# Altium PCB PCB_s01.PcbDoc (part 1 of 2)
Units mm, origin at the board's own origin, x right, y up, seen from the top; angles counter-clockwise.
Board outline 127 x 56.01 mm, 2 copper layers (Top Layer, Bottom Layer); 73 components, 51 nets, 213 pads, 570 vias.
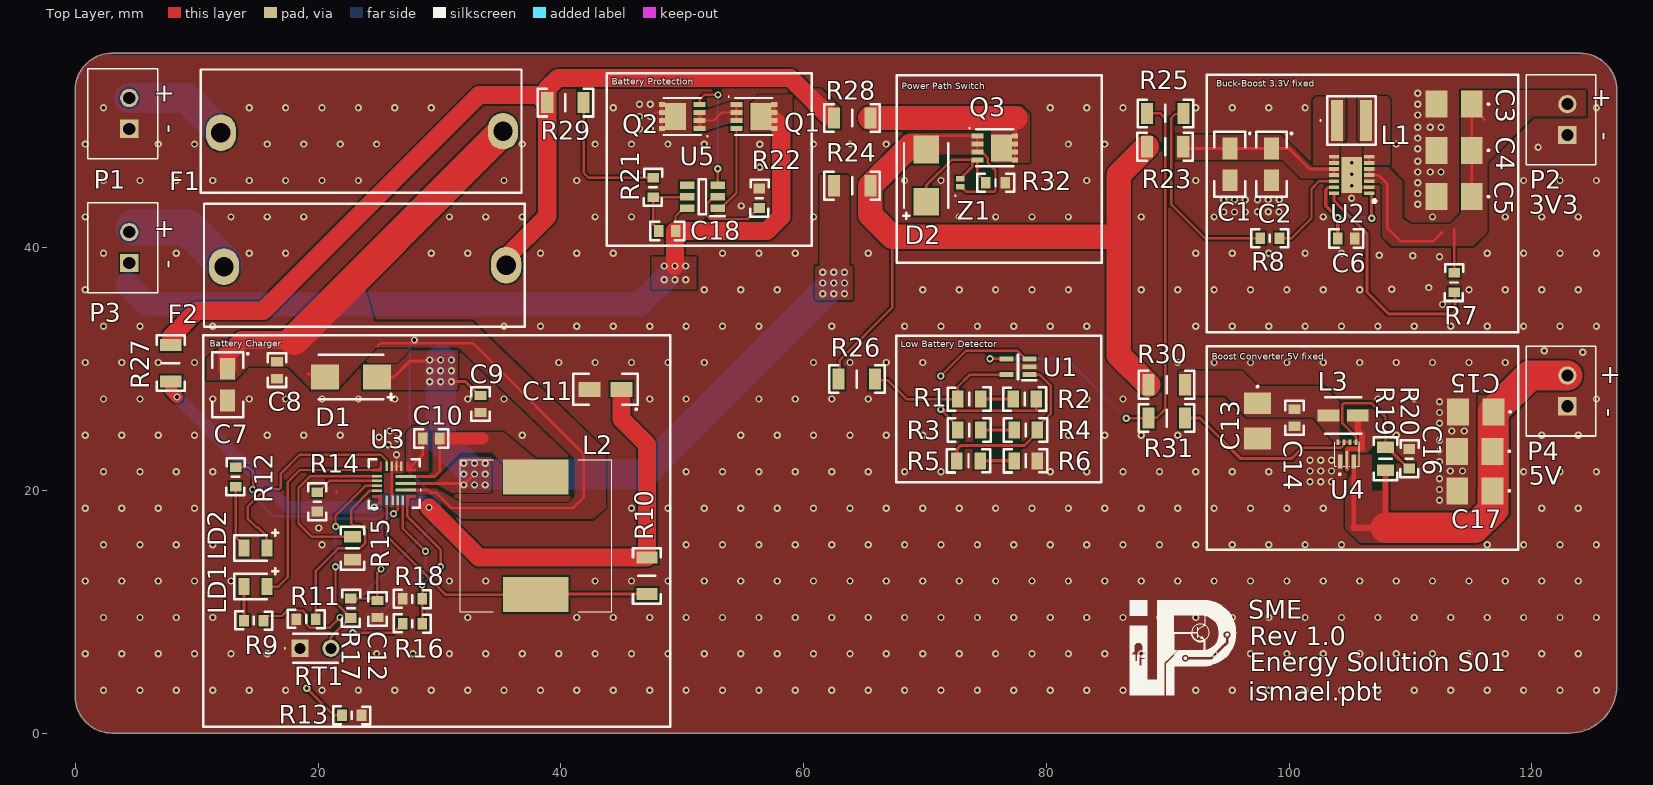
[diagram p0: Top Layer view]
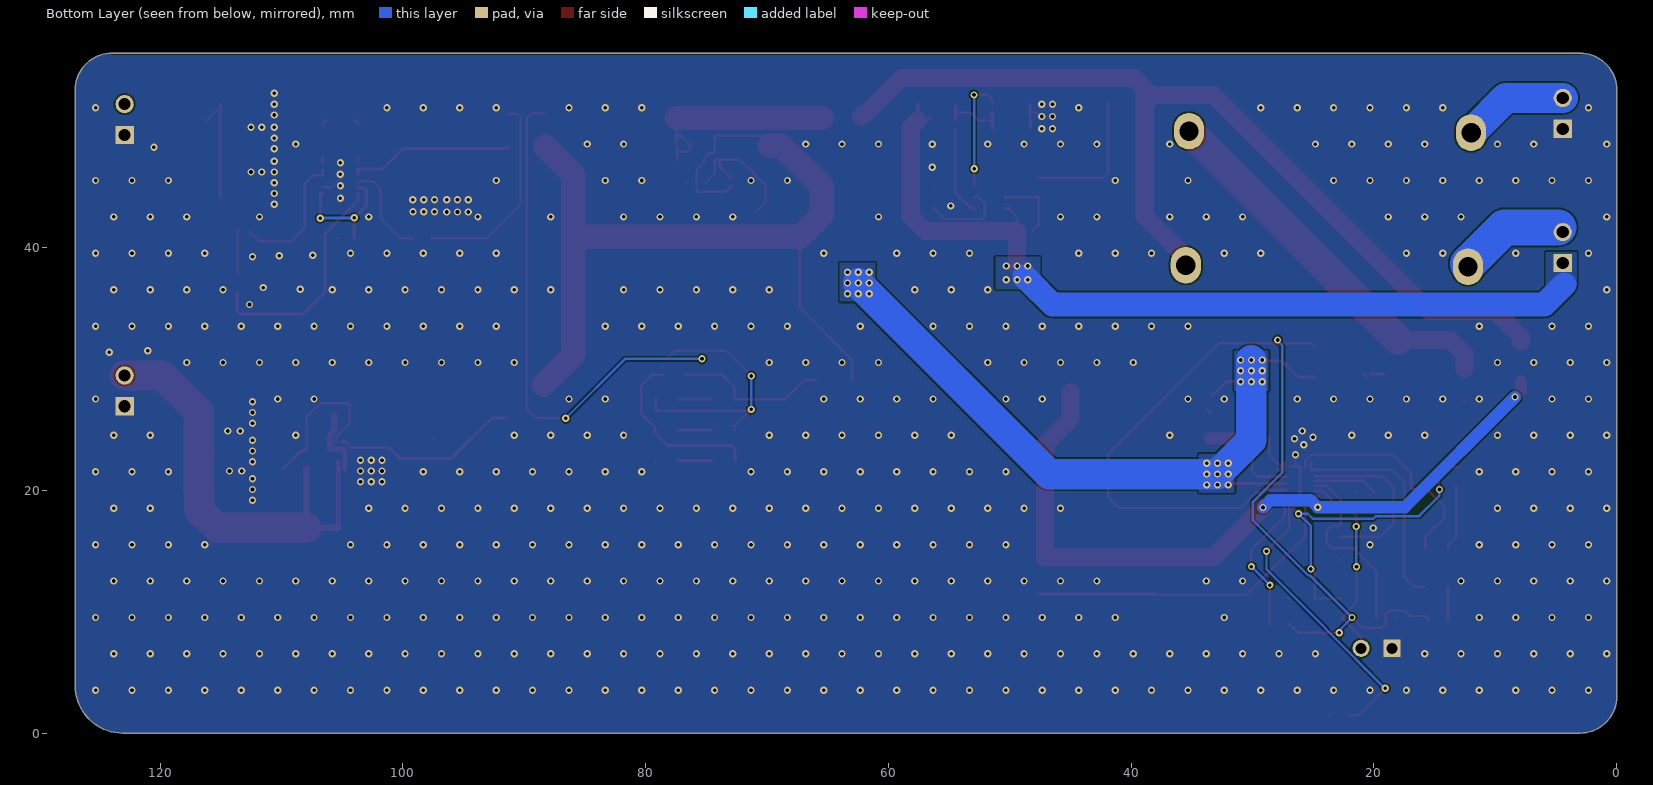
[diagram p1: Bottom Layer view, seen from below]
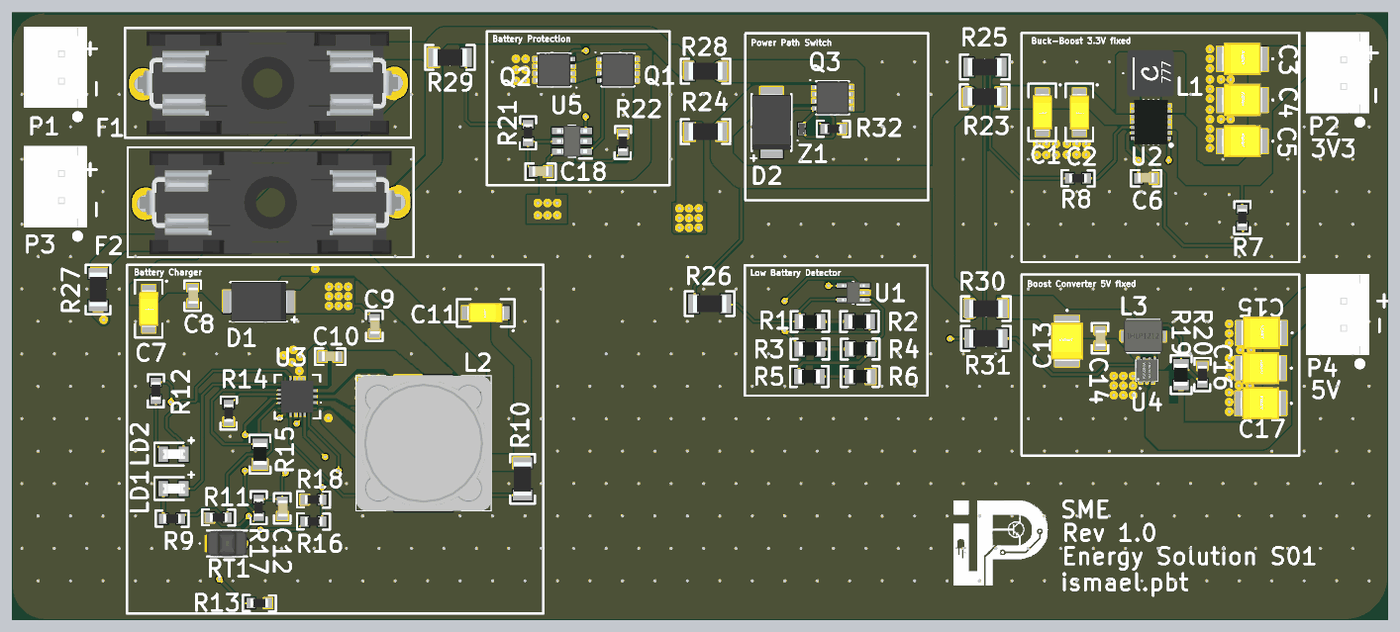
[diagram p2: 3D render of the assembled board from above, using the file's embedded part models]

## Layer stack, top to bottom
Top Solder: solder mask 0.0102, Solder Resist, Dk 3.5
Top Layer: signal copper 0.0356
Dielectric 1: dielectric 0.32, FR-4, Dk 4.8
Bottom Layer: signal copper 0.0356
Bottom Solder: solder mask 0.0102, Solder Resist, Dk 3.5

## Board outline
0.006,3.001 0,53.007 0.001,53.007 cw(c3.001,53.007) 3.001,56.007 124,56.007 124,56.008 cw(c124,53.008) 127,53.008 127,3.902 cw(c123.098,3.902) 123.098,0 3.006,0 3.006,0.001 cw(c3.006,3.001)
cut-out: 3.001,56.007 3.001,56.008 124,56.008

## Design rules (kind name [scope] priority, off if disabled: settings)
Clearance [All] p1: gap=0.13 ignorepadtopadclearanceinfootprint=FALSE
MinimumSolderMaskSliver [All] p1: minsoldermaskwidth=0.01
PolygonConnect PolygonConnect_Polygon_W [InNetClass('POWER')] p1: connectstyle=Direct reliefconductorwidth=0.254 reliefentries=4 polygonreliefangle="90 Angle" airgapwidth=0.254
PolygonConnect [All] p2: connectstyle=Relief reliefconductorwidth=0.254 reliefentries=4 polygonreliefangle="90 Angle" airgapwidth=0.254
RoutingVias [All] p1: holewidth=0.3 width=0.6 viastyle="Through Hole" minholewidth=0.3 minwidth=0.6 maxholewidth=0.711 maxwidth=6.6
SilkToSilkClearance [All] p1: silktosilkclearance=0.01
SilkToSolderMaskClearance [IsPad] p1: minsilkscreentomaskgap=0.01 clearancetoexposedcopper=TRUE
SolderMaskExpansion [All] p1: expansion=0.102 istentingtop=FALSE
SupplyNets "Schematic Supply Nets" [InNet('MP2759GQ_AGND')] p1: voltage=0.000
Width Width_POWER [InNetClass('POWER')] p1: maxlimit=6 minlimit=0.2 preferedwidth=3
Width [All] p2: maxlimit=6 minlimit=0.2 preferedwidth=0.2
27 further rules are at their usual default settings.

## Classes and differential pairs
net class POWER: GND MP2759GQ_BAT+ NetC1_1 NetC3_1 NetC7_1 NetC9_2 NetC10_1 NetC10_2 NetC13_1 NetC15_1 NetC18_1 NetD2_1 NetF1_1 NetF2_1 NetF2_2 NetL1_1 NetL1_2 NetL3_2 NetQ1_1 NetQ3_3
component class U_SME_tps63021: C1 C2 C3 C4 C5 C6 L1 R7 R8 U2
component class U_SME_tps61022: C13 C14 C15 C16 C17 L3 R19 R20 U4
component class U_SME_S8261: C18 Q1 Q2 R21 R22 U5
component class U_SME_MP2759GQ_PowerPath: D2 Q3 R32 Z1
component class U_SME_mp2759gq: C7 C8 C9 C10 C11 C12 D1 L2 LD1 LD2 R9 R10 R11 R12 R13 R14 R15 R16 R17 R18 RT1 U3
component class U_SME_mic841: R1 R2 R3 R4 R5 R6 U1
component class SME_Main: F1 F2 P1 P2 P3 P4 R23 R24 R25 R26 R27 R28 R29 R30 R31

## Components (designator, comment, footprint, x,y, rotation, side; value= is the part's Value field where it differs from the comment)
C1 "T491A106M016AT" CASE_A 95.123,46.863 r270 top
C2 "T491A106M016AT" CASE_A 98.551,46.863 r270 top
C3 "T491B226K006AT" "T491B / CASE_B" 113.602,51.816 r180 top
C4 "T491B226K006AT" "T491B / CASE_B" 113.602,48.006 r180 top
C5 "T491B226K006AT" "T491B / CASE_B" 113.602,44.196 r180 top
C6 "CC0603KRX7R9BB104" C0603 104.713,40.767 r180 top
C7 "T491A106M016AT" CASE_A 12.549,28.702 r270 top
C8 "CC0603KRX5R6BB105" C0603 16.613,29.91 r90 top
C9 "CC0603KRX7R5BB225" C0603 33.401,27.113 r90 top
C10 "CC0603KRX7R9BB104" C0603 29.313,24.257 r180 top
C11 "T491A106M016AT" CASE_A 43.688,28.321 r180 top
C12 "CC0603KRX5R6BB105" C0603 24.892,10.222 r90 top
C13 "T491B226K006AT" "T491B / CASE_B" 97.409,25.718 r270 top
C14 "CC0603KRX7R9BB104" C0603 100.457,25.973 r90 top
C15 "T491B226K006AT" "T491B / CASE_B" 115.377,26.461 r180 top
C16 "T491B226K006AT" "T491B / CASE_B" 115.307,23.207 r180 top
C17 "T491B226K006AT" "T491B / CASE_B" 115.32,19.953 r180 top
C18 "CC0603KRX7R9BB104" C0603 48.756,41.377 r180 top
D1 "CDBB240-HF" DO-214AA-2 22.709,29.337 r180 top
D2 "CDBB240-HF" DO-214AA-2 70.104,45.928 r90 top
F1 "FUSE - Littelfuse" "Fuse 22.7mm - 2 Hole" 23.622,49.53 r0 top
F2 "FUSE - Littelfuse" "Fuse 22.7mm - 2 Hole" 23.876,38.481 r0 top
L1 "XFL4020-152MEC" XFL4020152MEC 105.143,50.474 r0 top
L2 "10uH" "5050 _H4mm" 37.949,16.256 r270 top
L3 "IHLP1212BZEZ1R0M1Z" INDPM3030X200N 104.464,26.162 r0 top
LD1 "HSMS-C170" LED_0805_WHITE 14.835,12.065 r0 top
LD2 "HSMS-C170" LED_0805_WHITE 14.835,15.24 r0 top
P1 "B2B-XH-AM(LF)(SN)" "2Pin JST XH-2.54mm" 4.445,49.784 r90 top
P2 "B2B-XH-AM(LF)(SN)" "2Pin JST XH-2.54mm" 122.936,49.276 r90 top
P3 "B2B-XH-AM(LF)(SN)" "2Pin JST XH-2.54mm" 4.445,38.735 r90 top
P4 "B2B-XH-AM(LF)(SN)" "2Pin JST XH-2.54mm" 122.936,26.924 r90 top
Q1 "N-CH" "PowerPAK 1212-8-Pad" 55.914,50.801 r0 top
Q2 "N-CH" "PowerPAK 1212-8-Pad" 50.014,50.8 r180 top
Q3 "SISA35DN-T1-GE3" "PowerPAK 1212-8-Pad" 75.75,48.215 r0 top
R1 "RT0805FRE0740K2L" RES_0805 73.66,27.513 r180 top
R2 "RT0805FRE07560KL" RES_0805 78.232,27.513 r180 top
R3 "RT0805FRE072K2L" RES_0805 73.655,24.973 r180 top
R4 "RT0805FRE0733KL" RES_0805 78.293,24.973 r180 top
R5 "RC0805FR-100RL" RES_0805 73.594,22.433 r180 top
R6 "RT0805FRE07365KL" RES_0805 78.293,22.433 r180 top
R7 "RT0603FRE071ML" RES_0603 113.601,37.122 r90 top
R8 "RT0603FRE071ML" RES_0603 98.425,40.767 r0 top
R9 "RT0603FRE0720KL" RES_0603 14.708,9.271 r180 top
R10 "PE1206FRE470R02L" RES_1206 47.093,12.954 r90 top
R11 "RT0603FRE0727KL" RES_0603 19.012,9.396 r0 top
R12 "RT0603FRE072KL" RES_0603 13.208,21.106 r270 top
R13 "RT0603BRD0732KL" RES_0603 22.775,1.461 r180 top
R14 "RT0603FRD07100KL" RES_0603 19.939,19.05 r270 top
R15 "RC0805FR-100RL" RES_0805 22.836,15.24 r90 top
R16 "RT0603DRD07330KL" RES_0603 27.775,9.017 r180 top
R17 "RT0603FRE0710KL" RES_0603 22.709,10.287 r90 top
R18 "RT0603BRD07120KL" RES_0603 27.775,11.049 r0 top
R19 "RT0805BRD07732KL" RES_0805 107.95,22.606 r270 top
R20 "RT0603FRD07100KL" RES_0603 109.918,22.606 r270 top
R21 "RC0603FR-07470RL" RES_0603 47.601,44.958 r270 top
R22 "RT0603DRD072KL" RES_0603 56.364,44.069 r90 top
R23 "RC1206FR-070RL" RES_1206 89.788,48.307 r0 top
R24 "RC1206FR-070RL" RES_1206 64.008,45.085 r0 top
R25 "RC1206FR-070RL" RES_1206 89.813,51.054 r0 top
R26 "RC1206FR-070RL" RES_1206 64.389,29.164 r0 top
R27 "RC1206FR-070RL" RES_1206 7.874,30.48 r270 top
R28 "RC1206FR-070RL" RES_1206 64.008,50.673 r0 top
R29 "RC1206FR-070RL" RES_1206 40.386,51.943 r180 top
R30 "RC1206FR-070RL" RES_1206 89.916,28.702 r0 top
R31 "RC1206FR-070RL" RES_1206 89.916,25.955 r0 top
R32 "RT0603FRE071ML" RES_0603 75.819,45.339 r180 top
RT1 "103AT-2" 103AT2 18.518,6.985 r270 top
U1 "MIC841HYC5-TR" SOT65P210X110-5N 77.658,30.18 r180 top
U2 "TPS63021DSJR" VSON-14 105.156,45.974 r180 top
U3 "MP2759GQ-0000-P" QFN19_MP2759GQ0000P 26.265,20.574 r180 top
U4 "TPS61022RWUR" "7-Pin VQFN w thermal" 104.775,22.987 r90 top
U5 "S-8261AAXMD-G2XT2U" SOT95P275X135-6N 51.665,44.196 r180 top
Z1 "SZNZ8P12VMX2WT5G" SOD-923 72.898,45.339 r90 top

## Footprints (in the part's own frame and the unit in brackets; to place one, negate y for a bottom-side part, rotate by r counter-clockwise, add the part's x,y. Pads: shape width x height; smd on the part's side, far side on the other; paste and mask are expansions set on the pad)
"2Pin JST XH-2.54mm" [mm]
  rect 1.508x1.508 hole 1: 1(0,0)
  round 1.508 hole 1: 2(2.54,0)
  round 1.016 on Top Overlay: ""(-3.322,-1.534)
  silkscreen extent -2.45,-2.35 4.95,3.4, body extent -2.48,-2.39 4.92,3.36, height 7.01
"7-Pin VQFN w thermal" [mm]
  rect 1.15x0.35 smd: 1(-0.625,0.55) 3(-0.625,-0.55)
  rect 1.45x0.2 smd: 2(-0.475,0)
  rect 0.45x0.25 smd: 4(0.975,-0.75) 5(0.975,-0.25) 6(0.975,0.25) 7(0.975,0.75)
  silkscreen extent -1.7,-1 1,1, body extent -1.01,-1 1.01,1, height 1.01
103AT2 [mm]
  rect 1.416x1.416 hole 0.91: 1(0,0)
  round 1.416 hole 0.91: 2(0,2.54)
  silkscreen extent -1.2,-1.3 1.2,3.12, body extent -1.2,-0.58 1.2,3.12, height 6.44
"5050 _H4mm" [mm] "12.5mmx12.5mm"
  rect 2.9x5.4 smd: 1(-4.85,0) 2(4.85,0)
  silkscreen extent -6.25,-6.25 6.25,6.25, body extent -6.25,-6.25 6.25,6.25, height 4
C0603 [mm]
  rect 0.78x0.99 smd: 1(-0.7,0) 2(0.7,0)
  silkscreen extent -1.4,-0.76 1.4,0.76, body extent -0.76,-0.51 0.76,0.4, height 0.76
CASE_A [mm] "T495A"
  rect 1.8x1.23 smd: 1(-1.31,0) 2(1.31,0)
  silkscreen extent -2.67,-1.27 2.67,1.7, body extent -1.7,-0.89 1.7,0.91, height 1.81
DO-214AA-2 [mm]
  rect 2.3x2.1 smd: 1(2.15,0) 2(-2.15,0)
  silkscreen extent -3.55,-1.82 2.65,1.9, body extent -2.65,-1.83 2.65,1.83, height 3.2
"Fuse 22.7mm - 2 Hole" [mm]
  oval 2.5x3 hole 1.6: 1(-11.62,-0.064) 2(11.62,0.064)
  silkscreen extent -13.27,-5.02 13.14,5.14, body extent -12.11,-4.76 11.99,4.84, height 11.5
INDPM3030X200N [mm]
  rect 1.8x1 smd: 1(-1.2,0) 2(1.2,0)
  silkscreen extent -1.5,-1.5 1.5,1.5, body extent -1.83,-1.47 1.83,1.52, height 2.01
LED_0805_WHITE [mm]
  rect 0.9x1.4 smd: 1(-0.95,0) 2(0.95,0)
  silkscreen extent -1.75,-1.05 1.9,1.52, body extent -1,-0.46 1.06,0.45, height 0.85
"PowerPAK 1212-8-Pad" [mm]
  rect 0.99x0.405 smd: 1(-1.435,-0.33) 1(-1.435,0.33) 1(-1.435,0.99) 2(-1.435,-0.99)
  rect 1.725x2.235 smd: 3(0.577,-0.001)
  rect 0.51x0.405 smd: 3(1.675,-0.99) 3(1.675,-0.33) 3(1.675,0.33) 3(1.675,0.99)
  silkscreen extent -2.12,-1.52 1.52,1.67, body extent -1.65,-1.65 1.65,1.65, height 1.27
QFN19_MP2759GQ0000P [mm]
  rect 1.7x0.25 smd: 1(-0.95,0.55) 2(-0.95,0) 3(-0.95,-0.55)
  round 0.025 smd: 4(-1.15,-1.15) 9(1.15,-1.15) 14(1.15,1.15) 19(-1.15,1.15)
  rect 0.2x0.8 smd: 5(-0.6,-1.4) 6(-0.2,-1.4) 7(0.2,-1.4) 8(0.6,-1.4) 15(0.6,1.4) 16(0.1,1.4) 17(-0.3,1.4) 18(-0.7,1.4)
  rect 0.8x0.2 smd: 10(1.4,-0.6) 11(1.4,-0.2) 12(1.4,0.2) 13(1.4,0.6)
  Top Layer region: 1,-1.8 1.2,-1.8 1.2,-1.301 1.2,-1.3 1.3,-1.3 1.3,-1.2 1.8,-1.2 1.8,-1 1,-1 1,-1
  Top Layer region: -1.8,-1 -1.8,-1.2 -1.3,-1.2 -1.3,-1.2 -1.3,-1.3 -1.2,-1.3 -1.2,-1.8 -1,-1.8 -1,-1 -1,-1
  Top Layer region: -1,1.8 -1.2,1.8 -1.2,1.301 -1.2,1.3 -1.3,1.3 -1.3,1.2 -1.8,1.2 -1.8,1 -1,1 -1,1
  Top Layer region: 1.8,1 1.8,1.2 1.3,1.2 1.3,1.2 1.3,1.3 1.2,1.3 1.2,1.8 1,1.8 1,1 1,1
  silkscreen extent -2.25,-2 2.07,2.05, body extent -1.51,-1.51 1.51,1.51, height 0.85
RES_0603 [mm] "RESC1608X55N"
  rect 0.8x0.95 smd: 1(-0.8,0) 2(0.8,0)
  silkscreen extent -1.52,-0.75 1.52,0.75, body extent -0.8,-0.4 0.8,0.4, height 0.46
RES_0805 [mm]
  rect 0.95x1.4 smd: 1(-0.95,0) 2(0.95,0)
  silkscreen extent -1.78,-0.96 1.78,0.96, body extent -0.98,-0.63 1.02,0.63, height 0.51
RES_1206 [mm] "RESC3116X65N"
  rect 1x1.75 smd: 1(-1.5,0) 2(1.5,0)
  silkscreen extent -2.29,-1.14 2.29,1.14, body extent -1.55,-0.8 1.55,0.8, height 0.65
SOD-923 [mm] "X2DFNW2-2"
  rect 0.45x0.7 smd: 1(-0.325,0) 2(0.325,0)
  silkscreen extent -1.12,0.33 -1.02,0.43, body extent -0.52,-0.3 0.52,0.3, height 0.37
SOT65P210X110-5N [mm]
  rect 1.15x0.4 smd: 1(-0.95,0.65) 2(-0.95,0) 3(-0.95,-0.65) 4(0.95,-0.65) 5(0.95,0.65)
  silkscreen extent -1.53,-1.01 0.03,1.1, body extent -1.05,-1.01 1.05,1.01, height 1.1
SOT95P275X135-6N [mm]
  rect 1.2x0.6 smd: 1(-1.25,0.95) 2(-1.25,0) 3(-1.25,-0.95) 4(1.25,-0.95) 5(1.25,0) 6(1.25,0.95)
  silkscreen extent -1.85,-1.45 0.3,1.6, body extent -1.38,-1.45 1.38,1.45, height 1.35
"T491B / CASE_B" [mm]
  rect 1.8x2.23 smd: 1(-1.46,0) 2(1.46,0)
  silkscreen extent -2.88,-0.05 -2.78,0.05, body extent -1.85,-1.5 1.85,1.5, height 2.1
VSON-14 [mm]
  rect 0.85x0.3 smd: 1(-1.45,1.5) 2(-1.45,1) 3(-1.45,0.5) 4(-1.45,0) 5(-1.45,-0.5) 6(-1.45,-1) 7(-1.45,-1.5) 8(1.45,-1.5) 9(1.45,-1) 10(1.45,-0.5) 11(1.45,0) 12(1.45,0.5) 13(1.45,1) 14(1.45,1.5)
  rect 1.68x2.95 smd: 15(0,0)
  silkscreen extent -2,2.03 -1.75,2.27, body extent -1.62,-2.1 1.59,2.11, height 1
XFL4020152MEC [mm]
  rect 0.98x3.4 smd: 1(-1.185,0) 2(1.185,0)
  silkscreen extent -2.6,-2 2,2, body extent -2.15,-2.15 2.15,2.15, height 2

## Part data
C1 C2 C7 C11: "KEMET - T491A106M016AT - Surface Mount Tantalum Capacitor, 10 µF, 16 V, 1206 [3216 Metric], T491 Series, ± 20%, -55 °C", Capacitance=10uF, Case Code (Imperial)=0603, Case Code (Metric)=1608, Dielectric=X5R, Dielectric Material=Tantalum, ESR (Equivalent Series Resistance)=7R, Leakage Current=1.6uA, Manufacturer="Yageo Group", Max Operating Temperature=85°C, Min Operating Temperature=-55°C, Package="A Case", Package Quantity=1, Ripple Current=104mA, Supplier Part Number 1=1276-1192-1-ND, Tolerance=10%, Voltage=16V, Voltage Rating=10V, Case/Package=0603, Category="Ceramic Capacitors", ComponentLink1Description=https://datasheet.ciiva.com/26877/getdatasheetpartid-359551-26877881.pdf?src-supplier=Verical, ComponentLink1URL=https://datasheet.ciiva.com/26877/getdatasheetpartid-359551-26877881.pdf?src-supplier=Verical, ComponentLink2Description=https://datasheet.ciiva.com/29198/457369-da-01-en-vs-kondensator-0603-29198790.pdf?src-supplier=Conrad, ComponentLink2URL=https://datasheet.ciiva.com/29198/457369-da-01-en-vs-kondensator-0603-29198790.pdf?src-supplier=Conrad, ComponentLink3Description=https://datasheet.ciiva.com/16200/cl05b104kq5nnnc-16200766.pdf?src-supplier=Future+Electronics, ComponentLink3URL=https://datasheet.ciiva.com/16200/cl05b104kq5nnnc-16200766.pdf?src-supplier=Future+Electronics, ComponentLink4Description=https://datasheet.ciiva.com/27092/1573281-27092884.pdf?src-supplier=Jameco, ComponentLink4URL=https://datasheet.ciiva.com/27092/1573281-27092884.pdf?src-supplier=Jameco, ComponentLink5Description=https://datasheet.ciiva.com/7696/1732759-7696297.pdf?src-supplier=Element14, ComponentLink5URL=https://datasheet.ciiva.com/7696/1732759-7696297.pdf?src-supplier=Element14, ComponentLink6Description=https://datasheet.ciiva.com/7696/1854511-7696298.pdf?src-supplier=Element14, ComponentLink6URL=https://datasheet.ciiva.com/7696/1854511-7696298.pdf?src-supplier=Element14, ComponentLink7Description=https://datasheet.ciiva.com/257/kem-t2005-t491-257611.pdf?src-supplier=Digi-Key, ComponentLink7URL=https://datasheet.ciiva.com/257/kem-t2005-t491-257611.pdf?src-supplier=Digi-Key, ComponentLink8Description=https://datasheet.ciiva.com/5934/kem-t2005-t491-5934795.pdf?src-supplier=Farnell, ComponentLink8URL=https://datasheet.ciiva.com/5934/kem-t2005-t491-5934795.pdf?src-supplier=Farnell, ComponentLink9Description=https://datasheet.ciiva.com/257/kem-t2005-t491-257612.pdf?src-supplier=Digi-Key, ComponentLink9URL=https://datasheet.ciiva.com/257/kem-t2005-t491-257612.pdf?src-supplier=Digi-Key, ComponentLink10Description=https://datasheet.ciiva.com/257/kem-t2005-t491-257613.pdf?src-supplier=Digi-Key, ComponentLink10URL=https://datasheet.ciiva.com/257/kem-t2005-t491-257613.pdf?src-supplier=Digi-Key, ComponentLink11Description=https://datasheet.ciiva.com/12883/kem-t2005-t491-12883118.pdf?src-supplier=Mouser, ComponentLink11URL=https://datasheet.ciiva.com/12883/kem-t2005-t491-12883118.pdf?src-supplier=Mouser, ComponentLink12Description=https://datasheet.ciiva.com/14589/70095774-14589054.pdf?src-supplier=Allied+Electronics, ComponentLink12URL=https://datasheet.ciiva.com/14589/70095774-14589054.pdf?src-supplier=Allied+Electronics, ComponentLink13Description=https://datasheet.ciiva.com/14597/70095774-14597406.pdf?src-supplier=Allied+Electronics, ComponentLink13URL=https://datasheet.ciiva.com/14597/70095774-14597406.pdf?src-supplier=Allied+Electronics, Contact Plating=Tin, Depth=0.8mm, Dissipation Factor=8%, Features="General Purpose", Height=0.8mm, Height - Seated (Max)=0.071inch, Lead Free="Lead Free", Lead Pitch=1.2mm, Length=1.6mm, Life (Hours)=2000Hour, Manufacturer Part Number=T491A106M016AT, Material=Ceramic, Mount="Surface Mount", Packaging="Tape and Reel", Polarity=Polar, Pricing 1="1=0.19000, 10=0.13200, 50=0.07940, 100=0.06700, 500=0.04588, 1000=0.04058 (USD)", Pricing 2="1=0.43000, 10=0.29900, 50=0.20940, 100=0.17950, 500=0.13464, 1000=0.11370 (USD)", Radiation Hardening=No, REACH SVHC="No SVHC", RoHS=Yes, Stock 1=1573745, Stock 2=249031, Supplier 1=Digi-Key, Supplier 2=Digi-Key, Supplier Part Number 2=399-3687-1-ND, Termination=SMD/SMT, Thickness=0.035inch, Type=SMD, Voltage Rating (DC)=10V, Width=0.031inch
C3 C4 C5: "Tantalum Capacitors - Solid SMD 6.3V 22uF 1311 10% ESR=3.5ohms", Capacitance=22uF, Manufacturer="Yageo Group", Package="B Case", Manufacturer Part Number=T491B226K006AT, Type=SMD
C6 C10: "Multilayer Ceramic Capacitors MLCC - SMD/SMT 50 V 0.1uF X7R 0603 10%", Capacitance=0.1uF, Manufacturer="Yageo Group", Package=0603, Manufacturer Part Number=CC0603KRX7R9BB104, Type=SMD
C8 C12: "Multilayer Ceramic Capacitors MLCC - SMD/SMT 10V 1uF X5R 0603 10% HI CV", Capacitance=1uF, Manufacturer="Yageo Group", Package=0603, Manufacturer Part Number=CC0603KRX5R6BB105, Type=SMD
C9: "Multilayer Ceramic Capacitors MLCC - SMD/SMT 6.3V 2.2uF X7R 0603 10% HI CV", Capacitance=2.2uF
C13 C15 C16 C17: "Tantalum Capacitors - Solid SMD 6.3V 22uF 1311 10% ESR=3.5ohms", Capacitance=22uF
C14 C18: "Multilayer Ceramic Capacitors MLCC - SMD/SMT 50 V 0.1uF X7R 0603 10%", Capacitance=0.1uF
D1: "Schottky Diode", Manufacturer=Comchip, Manufacturer_Name="Comchip Technology", Mouser Part Number=750-CDBB240-HF, Package=DO-214AA-2, Arrow Part Number=CDBB240-HF, Arrow Price/Stock=https://www.arrow.com/en/products/cdbb240-hf/comchip-technology?region=nac, Datasheet Link=https://datasheet.datasheetarchive.com/originals/distributors/DKDS41/DSANUWW0021461.pdf, Height=3.2mm, Manufacturer Part Number=CDBB240-HF, Manufacturer_Part_Number=CDBB240-HF, Mouser Price/Stock=https://www.mouser.co.uk/ProductDetail/Comchip-Technology/CDBB240-HF?qs=%252BiOMRfgENTHvuVH5OF%252BwbA%3D%3D, Type=SMD
D2: "Schottky Diode", Manufacturer_Name="Comchip Technology", Mouser Part Number=750-CDBB240-HF, Arrow Part Number=CDBB240-HF, Arrow Price/Stock=https://www.arrow.com/en/products/cdbb240-hf/comchip-technology?region=nac, Datasheet Link=https://datasheet.datasheetarchive.com/originals/distributors/DKDS41/DSANUWW0021461.pdf, Height=3.2mm, Manufacturer_Part_Number=CDBB240-HF, Mouser Price/Stock=https://www.mouser.co.uk/ProductDetail/Comchip-Technology/CDBB240-HF?qs=%252BiOMRfgENTHvuVH5OF%252BwbA%3D%3D
F1 F2: "LITTELFUSE WICKMANN - 64600001003 - FUSE HOLDER, 5 X 20MM, PCB MOUNT", Color=Black, Current Rating=6.3A, Flammability Rating="UL94 V-1", Fuse value=3A, Manufacturer="Littelfuse Wickmann", Manufacturer Part Number=64600001003, Max Operating Temperature=70°C, Min Operating Temperature=-25°C, Package="2 Pos", Package Quantity=1000, Supplier Part Number 1=WK6244-ND, Voltage=250V, Body Material=Polyamide, Category="Fuse Holders", ComponentLink1Description=https://datasheet.ciiva.com/14119/gqlittelfuse-sicherungshalter-646-en-14119833.pdf?src-supplier=Distrelec, ComponentLink1URL=https://datasheet.ciiva.com/14119/gqlittelfuse-sicherungshalter-646-en-14119833.pdf?src-supplier=Distrelec, ComponentLink2Description=https://datasheet.ciiva.com/25620/0900766b81196eda-25620105.pdf?src-supplier=RSComponents, ComponentLink2URL=https://datasheet.ciiva.com/25620/0900766b81196eda-25620105.pdf?src-supplier=RSComponents, ComponentLink3Description=https://datasheet.ciiva.com/23593/43388-23593468.pdf?src-supplier=Newark, ComponentLink3URL=https://datasheet.ciiva.com/23593/43388-23593468.pdf?src-supplier=Newark, ComponentLink4Description=https://datasheet.ciiva.com/1270/1480080-1270114.pdf?src-supplier=Element14, ComponentLink4URL=https://datasheet.ciiva.com/1270/1480080-1270114.pdf?src-supplier=Element14, ComponentLink5Description=https://datasheet.ciiva.com/4480/646-648-640-lf-050901-4480295.pdf?src-supplier=Mouser, ComponentLink5URL=https://datasheet.ciiva.com/4480/646-648-640-lf-050901-4480295.pdf?src-supplier=Mouser, ComponentLink6Description=https://datasheet.ciiva.com/7660/646-648-640-lf-050901-7660727.pdf?src-supplier=Element14, ComponentLink6URL=https://datasheet.ciiva.com/7660/646-648-640-lf-050901-7660727.pdf?src-supplier=Element14, ComponentLink7Description=https://datasheet.ciiva.com/295/646-648-640-lf-050901-295754.pdf?src-supplier=Digi-Key, ComponentLink7URL=https://datasheet.ciiva.com/295/646-648-640-lf-050901-295754.pdf?src-supplier=Digi-Key, ComponentLink8Description=https://datasheet.ciiva.com/15187/getdatasheetpartid-57320-15187869.pdf?src-supplier=Verical, ComponentLink8URL=https://datasheet.ciiva.com/15187/getdatasheetpartid-57320-15187869.pdf?src-supplier=Verical, Depth=5.5mm, Fuse Current=6.3A, Illumination Type=Illuminated, Lead Free="Lead Free", Length=25.8mm, Material=Tin, Mount=Horizontal,PCB, Number of Circuits=1, Number of Pins=2, Number of Poles=1, Packaging=Bulk, Pricing 1="1=0.84000, 5=0.81200, 10=0.76000, 50=0.62880, 100=0.52400, 250=0.51092, 500=0.43230, 1000=0.37990, 5000=0.34060 (USD)", REACH SVHC=Unknown, RoHS=Yes, Stock 1=1999, Supplier 1=Digi-Key, Termination="PC Pin", Type=thru-hole, Voltage Rating=250V, Voltage Rating (AC)=250V, Voltage Rating (DC)=250V, Width=12mm
L1: "COILCRAFT - XFL4020-152MEC - Power Inductor (SMD), 1.5 H, 9.1 A, Shielded, 4.1 A, XFL4020", Manufacturer=Coilcraft, Manufacturer_Name=COILCRAFT, Mouser Part Number=994-XFL4020-152MEC, Package=1616, Datasheet Link=https://www.coilcraft.com/getmedia/50632d43-da1b-4cdb-8ab4-3029cab51df3/xfl4020.pdf, Geometry.Height=2.1mm, Manufacturer Part Number=XFL4020-152MEC, Manufacturer_Part_Number=XFL4020-152MEC, Mouser Price/Stock=https://www.mouser.co.uk/ProductDetail/Coilcraft/XFL4020-152MEC?qs=zCSbvcPd3pak5QYA2uujRA%3D%3D, Type=SMD
L2: library part SRR1240-100M, "Power Inductors - SMD 10uH 20% SMD 1240", Manufacturer="Samsung Electro-Mechanics", Manufacturer Part Number=CIGT201210UHR47MNE, Manufacturer_Name=Bourns, Mouser Part Number=652-SRR1240-100M, Package=0805, Arrow Part Number=SRR1240-100M, Arrow Price/Stock=https://www.arrow.com/en/products/srr1240-100m/bourns?region=europe, ComponentLink1Description="New link", ComponentLink1URL=https://www.mouser.com/ProductDetail/Bourns/SRR1240-100M?qs=uD%2FoUDWqfvRyQbveYihOGw%3D%3D, Datasheet Link=https://www.mouser.it/datasheet/2/54/SRR1240-1391459.pdf, Height=4.5mm, Manufacturer_Part_Number=SRR1240-100M, Mouser Price/Stock=https://www.mouser.co.uk/ProductDetail/Bourns/SRR1240-100M?qs=uD%2FoUDWqfvRyQbveYihOGw%3D%3D, Type=SMD
L3: "1 H Shielded Molded Inductor 8.4 A 20mOhm Max 1212 (3030 Metric)", Manufacturer_Name=Vishay, Datasheet Link=https://www.vishay.com/docs/34671/ihlp1212-ez-1z.pdf, Geometry.Height=2mm, Manufacturer_Part_Number=IHLP1212BZEZ1R0M1Z
LD1 LD2: "Single Color LEDs Red Diffused 626nm 10mcd", Manufacturer=Broadcom, Manufacturer Part Number=HSMS-C170, Package=HSMS-C170, Type=SMD
P1 P2 P3 P4: "CONN HEADER VERT 2POS 2.5MM"
Q1 Q2: library part SI7106DN-T1-GE3, "MOSFET (N-Channel)", Manufacturer_Name=Vishay, Mouser Part Number=781-SI7106DN-T1-GE3, Arrow Part Number=SI7106DN-T1-GE3, Arrow Price/Stock=https://www.arrow.com/en/products/si7106dn-t1-ge3/vishay?region=nac, ComponentLink1Description="New link", ComponentLink1URL=https://www.mouser.com/ProductDetail/Vishay-Semiconductors/SI7106DN-T1-GE3?qs=tWM4QuTcS4UXbO9qkz0xcQ%3D%3D, Datasheet Link=https://www.arrow.com/en/products/si7106dn-t1-ge3/vishay, Height=1.12mm, Manufacturer_Part_Number=SI7106DN-T1-GE3, Mouser Price/Stock=https://www.mouser.co.uk/ProductDetail/Vishay-Semiconductors/SI7106DN-T1-GE3?qs=tWM4QuTcS4UXbO9qkz0xcQ%3D%3D
Q3: "MOSFET P-CHANNEL 30-V (D-S) PowerPAK 1212-8", Manufacturer_Name=Vishay, Mouser Part Number=78-SISA35DN-T1-GE3, Datasheet Link=https://www.vishay.com/docs/75831/sisa35dn.pdf, Geometry.Height=1.17mm, Manufacturer_Part_Number=SISA35DN-T1-GE3, Mouser Price/Stock=https://www.mouser.co.uk/ProductDetail/Vishay-Semiconductors/SISA35DN-T1-GE3?qs=xZ%2FP%252Ba9zWqbzg0tXMvfS4g%3D%3D
R1: "Thin Film Resistors - SMD 1/8W 40.2K ohm 1% 50ppm", Case/Package=0805, Resistance=40.2K
R2: "Thin Film Resistors - SMD 1/8W 560K ohm 1% 50ppm", Case/Package=0805, Resistance=560K
R3: "Thin Film Resistors - SMD 1/8W 2.2K ohm 1% 50p pm", Case/Package=0805, Resistance=2.2K
R4: "Thin Film Resistors - SMD 1/8W 33K ohm 1% 50ppm", Case/Package=0805, Resistance=33K
R5: "Thick Film Resistors - SMD General Purpose Chip Resistor 0805, 0Ohms, 1%, 1/8W", Case/Package=0805, Resistance=0R
R6: "Thin Film Resistors - SMD 1/8W 365K ohm 1% 50ppm", Case/Package=0805, Resistance=365K
R7 R8: "Thin Film Resistors - SMD 1M OHM 1% 50PPM 1/10 W", Case/Package=0603, Manufacturer="Yageo Group", Resistance=1M, Manufacturer Part Number=RT0603FRE071ML, Package=0603, Type=SMD
R9: "Thin Film Resistors - SMD 1/10W 20K ohm 1% 50ppm", Case/Package=0603, Manufacturer="Yageo Group", Resistance=20K, Manufacturer Part Number=RT0603FRE0720KL, Package=0603, Type=SMD
R10: "Current Sense Resistors - SMD 20 mOhms 1 W 50PPM/C 1206", Manufacturer="Yageo Group", Package=1206, Resistance=20mR, Manufacturer Part Number=PE1206FRE470R02L, Type=SMD
R11: "Thin Film Resistors - SMD 1/10W 27K ohm 1% 50ppm", Case/Package=0603, Manufacturer="Yageo Group", Resistance=27K, Manufacturer Part Number=RT0603FRE0727KL, Package=0603, Type=SMD
R12: "Thin Film Resistors - SMD 1/10W 2K ohm 1% 50ppm", Case/Package=0603, Resistance=2K
R13: "Thin Film Resistors - SMD 1/10W 32K Ohms 0.1%", Case/Package=0603, Manufacturer="Yageo Group", Resistance=32K, Manufacturer Part Number=RT0603BRD0732KL, Package=0603, Type=SMD
R14: "Thin Film Resistors - SMD 100K OHM 1% 25PPM 1/10W", Case/Package=0603, Manufacturer="Yageo Group", Resistance=100K, Manufacturer Part Number=RT0603FRD07100KL, Package=0603, Type=SMD
R15: "Thick Film Resistors - SMD General Purpose Chip Resistor 0805, 0Ohms, 1%, 1/8W", Case/Package=0805, Manufacturer="Yageo Group", Manufacturer Part Number=RC0805FR-10100RL, Resistance=0R, Package=0805, Type=SMD
R16: "Thin Film Resistors - SMD 330K OHM .5% 25PPM 1/10W", Resistance=330K
R17: "Thin Film Resistors - SMD 10K ohm 1% 1/10W", Case/Package=0603, Manufacturer="Yageo Group", Resistance=10K, Manufacturer Part Number=RT0603FRE0710KL, Package=0603, Type=SMD
R18: "Thin Film Resistors - SMD 1/10W 120K ohm .1% 25ppm", Resistance=120K
R19: "Thin Film Resistors - SMD 732 kOhms 25PPM/C 125mW 0805 10%", Case/Package=0805, Resistance=732K
R20: "Thin Film Resistors - SMD 100K OHM 1% 25PPM 1/10W", Case/Package=0603, Resistance=100K
R21: "470 Ohms ±1% 0.1W, 1/10W Chip Resistor 0603 (1608 Metric) Moisture Resistant Thick Film", Case/Package=0603, Resistance=470R
R22: "Thin Film Resistors - SMD 2K Ohm 0.5% 1/10W 75 Volts 25ppm", Case/Package=0603, Resistance=2K
R23 R24 R25 R26 R27 R28 R29 R30 R31: "Thick Film Resistors - SMD 0 Ohms 250 mW 1206 1%", Case/Package=1206, Manufacturer="Yageo Group", Mouser Part Number=603-RC1206FR-070RL, Resistance=0R, Datasheet Link=https://www.yageogroup.com/content/datasheet/asset/file/PYU-RC_GROUP_51_ROHS_L, Geometry.Height=0.65mm, Manufacturer Part Number=RC1206FR-070RL, Manufacturer_Name="Yageo Group", Manufacturer_Part_Number=RC1206FR-070RL, Mouser Price/Stock=https://www.mouser.co.uk/ProductDetail/YAGEO/RC1206FR-070RL?qs=%2FbpERZPLKKvgeF8VBtNQLg%3D%3D, Package=1206, Type=SMD
R32: "Thin Film Resistors - SMD 1M OHM 1% 50PPM 1/10 W", Case/Package=0603, Resistance=1M
RT1: "NTC Thermistors 10kohm 1%", Manufacturer=Semitec, Package="2 Pos", Resistance=10K, Manufacturer Part Number=103AT-2, Type=thru-hole
U1: "Microchip MIC841HYC5-TR Dual Comparator, Open Drain, Push-Pull O/P, 12us 1.5  5.5 V 5-Pin SC-70", Manufacturer_Name=Microchip, Mouser Part Number=998-MIC841HYC5TR, Datasheet Link=http://ww1.microchip.com/downloads/en/devicedoc/20005758a.pdf, Geometry.Height=1.1mm, Manufacturer_Part_Number=MIC841HYC5-TR, Mouser Price/Stock=https://www.mouser.co.uk/ProductDetail/Microchip-Technology/MIC841HYC5-TR?qs=U6T8BxXiZAVOe5BH1VWqpQ%3D%3D
U2: "High Efficiency Single Inductor Buck-Boost Converter with 4A Switch", Manufacturer="Texas Instruments", Mouser Part Number=595-TPS63021DSJR, Package=VSON-14, Datasheet Link=http://www.ti.com/lit/gpn/tps63021, Geometry.Height=1mm, Manufacturer Part Number=TPS63021DSJR, Manufacturer_Name="Texas Instruments", Manufacturer_Part_Number=TPS63021DSJR, Mouser Price/Stock=https://www.mouser.co.uk/ProductDetail/Texas-Instruments/TPS63021DSJR?qs=C44r%252BX3hXgL5uT9uesn8fg%3D%3D, Type=SMD
U3: "Integrated Circuit", Manufacturer="Monolithic Power Systems", Manufacturer_Name="Monolithic Power Systems (MPS)", Mouser Part Number=946-MP2759GQ-0000-P, Package=QFN-19, Datasheet Link=https://www.monolithicpower.cn/cn/documentview/productdocument/index/version/2/document_type/Datasheet/lang/en/sku/MP2759GQ/, Height=1mm, Manufacturer Part Number=MP2759GQ-0000-P, Manufacturer_Part_Number=MP2759GQ-0000-P, Mouser Price/Stock=https://www.mouser.co.uk/ProductDetail/Monolithic-Power-Systems-MPS/MP2759GQ-0000-P?qs=QNEnbhJQKvaMJpbzSVzajw%3D%3D, Type=SMD
U4: "8-A boost converter with 0.5-V ultra-low input voltage", Manufacturer_Name="Texas Instruments", Mouser Part Number=595-TPS61022RWUR, Datasheet Link=http://www.ti.com/lit/gpn/TPS61022, Geometry.Height=1mm, Manufacturer_Part_Number=TPS61022RWUR, Mouser Price/Stock=https://www.mouser.co.uk/ProductDetail/Texas-Instruments/TPS61022RWUR?qs=vLWxofP3U2zlxrk4cD0iFA%3D%3D
U5: "Battery Battery Protection IC Lithium Ion/Polymer SOT-23-6"
Z1: "Zener Diode", Manufacturer_Name=onsemi, Datasheet Link=https://www.onsemi.com/pub/Collateral/NZ8PMX2-D.PDF, Height=0.4mm, Manufacturer_Part_Number=SZNZ8P12VMX2WT5G

## Via types
v1: diameter 0.6, hole 0.3, Top Layer to Bottom Layer, tented both sides, 451 vias
v2: diameter 0.6, hole 0.3, Top Layer to Bottom Layer, 119 vias

## Nets (pads, with @x,y where several pads share a name; then routed paths per layer and width w, separated by ;. In a path a pad name is that pad's centre, name@x,y a point inside that pad or via, vN(x,y) a via of type N, cw(c..) or ccw(c..) an arc to the next point about the centre after c; other vN are vias at no path point)
CTRL_REG: R25.1 R31.1 U1.4 | length 43.8
  Top Layer w0.2: v2(75.362,30.83) U1.4 ; v2(86.593,25.933) R31.1@88.416,25.933 ; R25.1 89.408,51.054 89.789,50.673 89.789,26.67 89.099,25.98 88.462,25.98 R31.1@88.416,25.933 ; R31.1 R31.1@88.416,25.933
  Bottom Layer w0.2: v2(75.362,30.83) 81.697,30.83 v2(86.593,25.933)
GND: C1.2 C2.2 C3.2 C4.2 C5.2 C6.1 C7.2 C8.1 C9.1 C11.2 C12.1 C13.2 C14.1 C15.2 C16.2 C17.2 P1.1 P2.1 P4.1 Q2.3 R6.1 R11.1 R13.1 R14.2 R15.1 R18.1 R20.1 R22.2 R32.1 RT1.1 U1.2 U2.2 U2.15 U3.5 U3.6 U3.7 U3.16 U4.1 | length 11.4
  Top Layer w0.2: C7.2 C7.2@12.589,27.432 ; R11.1 R11.1@18.238,9.37 ; 21.516,19.812 21.544,19.84 ; R15.1 R15.1@22.86,14.266 ; R13.1 R13.1@23.638,1.524 ; U3.16 26.166,19.474 26.065,19.574 U3.7 U3.6 ; v2(26.465,22.938) U3.6 ; U3.5 U3.6 ; R18.1 R18.1@27.051,11.125 ; C9.1@33.444,26.351 C9.1@33.796,26.703 ; v2(47.371,50.8) 47.455,50.8 47.785,51.13 48.34,51.13 Q2.3@48.34,50.47 ; R22.2@56.326,44.831 R22.2 ; U1.2 U1.2@78.631,30.203 ; R6.1 R6.1@79.252,22.424 ; C13.2 C13.2 ; U2.15 105.156,45.714 105.896,44.974 U2.2 ; C6.1@105.41,40.764 C6.1 ; Q2.3@48.34,50.47 48.285,50.47 48.285,49.81 48.34,49.81 Q2.3@48.34,50.47
  Top Layer w0.254: Q2.3@48.34,51.13 Q2.3@48.34,51.79
  other v1: 2.326,3.527 5.326,3.527 8.326,3.527 11.326,3.527 14.326,3.527 17.326,3.527 20.326,3.527 23.326,3.527 26.326,3.527 29.326,3.527 32.326,3.527 35.326,3.527 38.326,3.527 41.326,3.527 44.326,3.527 47.326,3.527 50.326,3.527 53.326,3.527 56.326,3.527 59.326,3.527 62.326,3.527 65.326,3.527 68.326,3.527 71.326,3.527 74.326,3.527 77.326,3.527 80.326,3.527 83.326,3.527 86.326,3.527 89.326,3.527 92.326,3.527 95.326,3.527 98.326,3.527 101.326,3.527 104.326,3.527 107.326,3.527 110.326,3.527 113.326,3.527 116.326,3.527 119.326,3.527 122.326,3.527 125.326,3.527 0.826,6.527 3.826,6.527 6.826,6.527 9.826,6.527 12.826,6.527 15.826,6.527 24.826,6.527 27.826,6.527 30.826,6.527 33.826,6.527 36.826,6.527 39.826,6.527 42.826,6.527 45.826,6.527 48.826,6.527 51.826,6.527 54.826,6.527 57.826,6.527 60.826,6.527 63.826,6.527 66.826,6.527 69.826,6.527 72.826,6.527 75.826,6.527 78.826,6.527 81.826,6.527 84.826,6.527 87.826,6.527 90.826,6.527 93.826,6.527 96.826,6.527 99.826,6.527 102.826,6.527 105.826,6.527 108.826,6.527 111.826,6.527 114.826,6.527 117.826,6.527 120.826,6.527 123.826,6.527 2.326,9.527 5.326,9.527 8.326,9.527 11.326,9.527 32.326,9.527 41.326,9.527 44.326,9.527 47.326,9.527 50.326,9.527 53.326,9.527 56.326,9.527 59.326,9.527 62.326,9.527 65.326,9.527 68.326,9.527 71.326,9.527 74.326,9.527 77.326,9.527 80.326,9.527 83.326,9.527 86.326,9.527 89.326,9.527 92.326,9.527 95.326,9.527 98.326,9.527 101.326,9.527 104.326,9.527 107.326,9.527 110.326,9.527 113.326,9.527 116.326,9.527 119.326,9.527 122.326,9.527 125.326,9.527 0.826,12.527 3.826,12.527 6.826,12.527 9.826,12.527 12.826,12.527 30.826,12.527 33.826,12.527 42.826,12.527 45.826,12.527 48.826,12.527 51.826,12.527 54.826,12.527 57.826,12.527 60.826,12.527 63.826,12.527 66.826,12.527 69.826,12.527 72.826,12.527 75.826,12.527 78.826,12.527 81.826,12.527 84.826,12.527 87.826,12.527 90.826,12.527 93.826,12.527 96.826,12.527 99.826,12.527 102.826,12.527 105.826,12.527 108.826,12.527 111.826,12.527 114.826,12.527 117.826,12.527 120.826,12.527 123.826,12.527 2.326,15.527 5.326,15.527 8.326,15.527 11.326,15.527 20.326,15.527 50.326,15.527 53.326,15.527 56.326,15.527 59.326,15.527 62.326,15.527 65.326,15.527 68.326,15.527 71.326,15.527 74.326,15.527 77.326,15.527 80.326,15.527 83.326,15.527 86.326,15.527 89.326,15.527 92.326,15.527 95.326,15.527 98.326,15.527 101.326,15.527 104.326,15.527 116.326,15.527 119.326,15.527 122.326,15.527 125.326,15.527 20.066,16.891 0.826,18.527 3.826,18.527 6.826,18.527 9.826,18.527 45.826,18.527 48.826,18.527 51.826,18.527 54.826,18.527 57.826,18.527 60.826,18.527 63.826,18.527 66.826,18.527 69.826,18.527 72.826,18.527 75.826,18.527 78.826,18.527 81.826,18.527 84.826,18.527 87.826,18.527 90.826,18.527 93.826,18.527 96.826,18.527 99.826,18.527 102.826,18.527 120.826,18.527 123.826,18.527 2.326,21.527 5.326,21.527 8.326,21.527 11.326,21.527 50.326,21.527 53.326,21.527 56.326,21.527 59.326,21.527 62.326,21.527 65.326,21.527 68.326,21.527 71.326,21.527 80.326,21.527 83.326,21.527 86.326,21.527 89.326,21.527 92.326,21.527 95.326,21.527 98.326,21.527 119.326,21.527 122.326,21.527 125.326,21.527 0.826,24.527 3.826,24.527 6.826,24.527 9.826,24.527 15.826,24.527 18.826,24.527 21.826,24.527 36.826,24.527 54.826,24.527 57.826,24.527 60.826,24.527 63.826,24.527 66.826,24.527 69.826,24.527 81.826,24.527 84.826,24.527 87.826,24.527 90.826,24.527 108.826,24.527 120.826,24.527 123.826,24.527 2.326,27.527 5.326,27.527 11.326,27.527 14.326,27.527 17.326,27.527 20.326,27.527 23.326,27.527 26.326,27.527 32.326,27.527 35.326,27.527 47.326,27.527 50.326,27.527 56.326,27.527 59.326,27.527 62.326,27.527 65.326,27.527 83.326,27.527 86.326,27.527 107.326,27.527 110.326,27.527 125.326,27.527 0.826,30.527 3.826,30.527 6.826,30.527 9.826,30.527 39.826,30.527 42.826,30.527 45.826,30.527 48.826,30.527 51.826,30.527 60.826,30.527 63.826,30.527 66.826,30.527 69.826,30.527 90.826,30.527 93.826,30.527 96.826,30.527 99.826,30.527 102.826,30.527 105.826,30.527 108.826,30.527 111.826,30.527 114.826,30.527 117.826,30.527 124.206,31.369 121.031,31.496 2.326,33.527 5.326,33.527 11.326,33.527 35.326,33.527 38.326,33.527 41.326,33.527 44.326,33.527 47.326,33.527 50.326,33.527 53.326,33.527 56.326,33.527 62.326,33.527 68.326,33.527 71.326,33.527 74.326,33.527 77.326,33.527 80.326,33.527 83.326,33.527 92.326,33.527 95.326,33.527 98.326,33.527 101.326,33.527 104.326,33.527 107.326,33.527 110.326,33.527 113.326,33.527 116.326,33.527 119.326,33.527 122.326,33.527 125.326,33.527 112.649,35.306 0.826,36.527 51.826,36.527 54.826,36.527 57.826,36.527 69.826,36.527 72.826,36.527 75.826,36.527 78.826,36.527 81.826,36.527 87.826,36.527 90.826,36.527 93.826,36.527 96.826,36.527 99.826,36.527 102.826,36.527 105.826,36.527 114.826,36.527 117.826,36.527 120.826,36.527 123.826,36.527 108.458,36.576 111.506,36.703 112.395,39.243 110.196,39.322 107.442,39.37 2.326,39.527 8.326,39.527 14.326,39.527 17.326,39.527 29.326,39.527 32.326,39.527 38.326,39.527 41.326,39.527 44.326,39.527 53.326,39.527 56.326,39.527 59.326,39.527 65.326,39.527 92.326,39.527 95.326,39.527 98.326,39.527 101.326,39.527 104.326,39.527 116.326,39.527 119.326,39.527 122.326,39.527 125.326,39.527 0.826,42.527 12.826,42.527 15.826,42.527 18.826,42.527 30.826,42.527 33.826,42.527 36.826,42.527 42.826,42.527 45.826,42.527 60.826,42.527 72.826,42.527 75.826,42.527 78.826,42.527 81.826,42.527 87.826,42.527 93.826,42.527 102.826,42.527 111.826,42.527 117.826,42.527 120.826,42.527 123.826,42.527 54.864,43.434 105.156,44.069 2.326,45.527 5.326,45.527 8.326,45.527 11.326,45.527 14.326,45.527 17.326,45.527 20.326,45.527 23.326,45.527 35.326,45.527 41.326,45.527 68.326,45.527 71.326,45.527 80.326,45.527 83.326,45.527 92.326,45.527 119.326,45.527 122.326,45.527 125.326,45.527 56.388,46.609 120.523,48.26 56.388,48.514 0.826,48.527 6.826,48.527 9.826,48.527 15.826,48.527 18.826,48.527 21.826,48.527 24.826,48.527 36.826,48.527 42.826,48.527 45.826,48.527 48.826,48.527 51.826,48.527 60.826,48.527 63.826,48.527 66.826,48.527 81.826,48.527 84.826,48.527 108.826,48.527 2.326,51.527 14.326,51.527 17.326,51.527 20.326,51.527 23.326,51.527 26.326,51.527 29.326,51.527 44.326,51.527 80.326,51.527 83.326,51.527 86.326,51.527 92.326,51.527 95.326,51.527 98.326,51.527 101.326,51.527 125.326,51.527
  other v2: 112.395,19.177 112.395,20.066 101.727,20.701 102.616,20.701 103.505,20.701 112.395,20.955 101.727,21.59 102.616,21.59 103.505,21.59 113.284,21.59 114.3,21.59 112.395,22.352 101.727,22.479 102.616,22.479 103.505,22.479 112.395,23.241 25.781,23.749 112.395,24.13 26.543,24.257 25.019,24.384 25.908,24.892 113.411,24.892 114.427,24.892 112.395,25.527 112.395,26.416 112.395,27.305 94.615,42.926 95.504,42.926 96.393,42.926 97.4,42.953 98.289,42.953 99.178,42.953 110.617,43.561 94.615,43.942 95.504,43.942 96.393,43.942 97.409,43.942 98.298,43.942 99.187,43.942 110.617,44.45 105.156,45.085 110.617,45.339 105.158,46.031 110.617,46.228 111.633,46.228 112.522,46.228 105.156,46.99 110.617,47.117 110.617,48.133 110.617,49.022 46.482,49.784 47.371,49.784 110.617,49.911 111.633,49.911 112.522,49.911 46.482,50.8 110.617,50.927 46.482,51.816 47.371,51.816 110.617,51.816 110.617,52.705
MP2759GQ_BAT+: C11.1 R10.2 R27.2 U3.14 | length 61.7
  Top Layer w0.2: v2(24.638,18.61) 25.116,19.088 U3.14
  Top Layer w1: R27.2 7.874,28.194 v2(8.382,27.686)
  Top Layer w1.5: v2(29.146,18.58) 33.273,14.454 R10.2 47.093,23.773 44.998,25.868 C11.1@44.998,28.067
  Bottom Layer w1: v2(8.382,27.686) 17.458,18.61 v2(24.638,18.61) 25.205,19.177 28.55,19.177 v2(29.146,18.58)
MP2759GQ_VCC: C12.2 R12.1 R17.2 U3.17 | length 27.3
  Top Layer w0.2: R12.1@13.045,21.906 14.283,21.906 14.655,21.534 14.655,20.116 v2(14.605,20.066) ; R17.2 24.868,11.087 24.868,13.184 v2(25.197,13.513) ; v2(26.221,18.072) 26.566,18.417 U3.17
  Bottom Layer w0.2: v2(14.605,20.066) 14.605,19.558 16.283,17.88 19.836,17.88 20.063,17.653 25.032,17.653 25.452,18.072 v2(26.221,18.072) 25.197,17.048 v2(25.197,13.513)
NetC1_1: C1.1 C2.1 R23.2 U2.10 U2.11 | length 13.7
  Top Layer w0.254: R23.2 91.422,48.173 C1.1 C2.1 99.988,48.173 101.687,46.474 U2.10 U2.11
NetC3_1: C3.1 C4.1 C5.1 P2.2 R7.2 U2.3 U2.4 U2.5 | length 24
  Top Layer w0.2: U2.5 U2.4 107.383,45.974 108.077,45.28 108.077,41.656 109.22,40.513 111.887,40.513 112.649,41.275 ; R7.2 113.601,41.529 ; C5.1 C4.1 115.062,50.165 C3.1@115.062,51.601 ; C3.1 C3.1@115.062,51.601 ; 116.117,50.546 C3.1@115.062,51.601
NetC6_2: C6.2 U2.1 U2.13 | length 10.2
  Top Layer w0.254: U2.13 103.683,44.951 103.203,44.951 103.024,44.772 103.024,43.436 v2(104.013,42.447) C6.2 ; U2.1 106.784,44.474 106.807,44.451 v2(106.807,42.418)
  Bottom Layer w0.254: v2(104.013,42.447) 104.028,42.433 106.792,42.433 v2(106.807,42.418)
NetC7_1: C7.1 C8.2 D1.1 F1.2 R9.1 R16.2 U3.1 | length 115.5
  Top Layer w0.2: R9.1 15.508,9.346 15.808,9.646 17.03,9.646 17.485,10.101 18.707,10.101 19.012,9.796 19.012,8.996 19.317,8.691 20.97,8.691 v2(21.804,9.525) ; D1.1 D1.1@20.814,29.591 ; v2(22.86,8.255) 26.213,8.255 26.6,8.642 26.675,8.642 26.975,8.942 R16.2 ; 24.917,31.877 25.171,32.131 32.742,32.131 41.91,22.963 41.91,19.431 41.021,18.542 30.988,18.542 29.718,19.812 29.313,19.812 29.101,20.024
  Top Layer w0.25: U3.1 29.101,20.024
  Top Layer w0.254: 19.177,29.567 D1.1@20.329,29.567
  Top Layer w1.5: C7.1 12.549,31.212 13.722,32.385 18.034,32.385 ; F1.2 F1.2@35.687,49.149
  Top Layer w1.8: F1.2@34.643,48.994 34.703,48.994 35.242,49.533 F1.2
  Top Layer w2.5: 18.034,32.385 F1.2@34.643,48.994
  Bottom Layer w0.2: v2(22.86,8.255) 22.783,8.332 22.783,8.546 v2(21.804,9.525) 25.262,12.983 25.416,12.983 29.972,17.538 29.972,19.05 27.559,21.463 27.559,31.917 27.94,32.298 v2(27.94,32.385)
NetC9_2: C9.2 D1.2 R24.1 U3.2 | length 61.4
  Top Layer w0.2: 28.805,30.672 28.867,30.734 v2(29.21,30.734) v2(30.099,30.734)
  Top Layer w0.25: U3.2 32.131,20.574 v2(32.893,21.336) ; v2(30.988,28.956) 32.153,28.956 33.296,27.813 C9.2
  Top Layer w0.254: D1.2 26.265,29.337 27.601,30.672 28.805,30.672
  Bottom Layer w2.5: v2(30.099,30.734) v2(30.099,29.845) v2(30.099,28.956) 30.099,24.13 v2(32.004,22.225) v2(32.893,21.336) v2(33.782,21.336) 46.761,21.336 62.484,37.059 v2(62.484,37.084)
  other v2: 32.004,20.447 32.893,20.447 33.782,20.447 32.004,21.336 32.893,22.225 33.782,22.225 29.21,28.956 29.21,29.845 30.988,29.845 30.988,30.734 61.595,36.195 62.484,36.195 63.373,36.195 61.595,37.084 63.373,37.084 61.595,37.973 62.484,37.973 63.373,37.973
NetC10_1: C10.1 L2.1 U3.3 | length 10.5
  Top Layer w0.2: 29.591,21.124 30.014,21.547 C10.1 ; L2.1@36.699,21.106 L2.1
  Top Layer w0.25: U3.3 29.591,21.124
  Top Layer w1: C10.1@30.023,24.266 33.539,24.266
NetC10_2: C10.2 U3.4 | length 3
  Top Layer w0.2: U3.4 28.614,22.922 C10.2
NetC13_1: C13.1 C14.2 L3.1 R30.2 U4.7
NetC15_1: C15.1 C16.1 C17.1 P4.2 R19.2 U4.3 | length 37.8
  Top Layer w0.35: 105.325,16.918 U4.3
  Top Layer w0.5: 105.325,16.918 107.95,16.918 R19.2@107.95,21.806
  Top Layer w2.5: 107.95,16.918 115.315,16.918 116.78,18.382 C17.1 ; C16.1 116.837,23.277 C15.1 119.839,29.464 P4.2 ; C17.1@116.837,20.01 C16.1@116.837,23.207
NetC18_1: C18.1 P3.1 Q1.3 U5.6 | length 72
  Top Layer w0.2: C18.1@49.403,41.376 49.454,41.427 49.454,42.584 50.116,43.246 U5.6 ; Q1.3@56.491,50.8 56.821,50.471 Q1.3@57.589,50.471 ; Q1.3@57.589,49.811 Q1.3@57.589,50.471 ; Q1.3@57.589,51.131 Q1.3@57.589,50.471
  Top Layer w0.254: Q1.3@57.589,51.131 Q1.3@57.589,51.791
  Top Layer w1.5: v2(49.403,38.481) C18.1@49.403,41.376 ; C18.1 56.997,41.376 58.166,42.545 58.166,49.894 Q1.3@57.589,50.471
  Bottom Layer w2: 4.318,36.957 5.969,35.306 46.482,35.306 v2(48.514,37.338) 48.768,37.592
  other v2: 49.403,37.338 50.302,37.348 48.514,38.481 50.292,38.481
NetC18_2: C18.2 R21.2 U5.5 | length 5.8
  Top Layer w0.2: C18.2 48.056,41.482 47.601,41.936 R21.2 50.377,44.158 U5.5
NetD2_1: D2.1 Q3.1 R23.1 R24.2 R26.1 R30.1 Z1.1 | length 78.7
  Top Layer w0.2: R26.1 62.992,29.267 62.992,30.734 67.31,35.052 67.31,40.894 ; D2.1@69.795,48.387 D2.1 70.104,49.205 74.315,49.205 74.315,48.545 74.315,47.885 74.417,47.782 74.78,47.782 75.184,47.378 75.184,46.99 75.819,46.355 75.819,44.711 75.702,44.594 73.389,44.594 73.148,44.835 73.148,44.889 73.023,45.014 Z1.1
  Top Layer w2: D2.1@69.795,48.387 68.81,48.387 R24.2 65.508,42.696 67.31,40.894 85.979,40.894 ; R23.1 85.979,45.998 85.979,40.894 ; R30.1 85.979,31.139 85.979,40.894
NetD2_2: D2.2 Q3.2 R32.2 Z1.2 | length 11.7
  Top Layer w0.2: D2.2@70.9,42.982 D2.2 70.104,45.117 72.212,47.225 Q3.2@73.914,47.225 ; Z1.2 73.914,46.68 Q3.2@73.914,47.225 ; R32.2 75.019,45.414 74.315,46.118 Q3.2 74.295,47.225 Q3.2@73.914,47.225
NetF1_1: F1.1 P1.2 | length 8.9
  Bottom Layer w2.5: P1.2 9.144,52.324 11.752,49.716 12.002,49.716 F1.1
NetF2_1: F2.1 P3.2 | length 8.9
  Bottom Layer w0.2: F2.1 F2.1@12.255,38.667
  Bottom Layer w3: P3.2@4.826,41.656 9.267,41.656 F2.1@12.255,38.667
NetF2_2: F2.2 R27.1 R28.1 R29.2 | length 80.9
  Top Layer w1.5: R27.1@7.874,32.258 7.874,32.639 10.033,34.798 15.494,34.798 33.274,52.578 38.126,52.578 38.761,51.943 R29.2 ; F2.2@35.242,38.672 35.242,38.921 38.886,42.565 R29.2 ; R28.1@62.258,50.798 62.008,51.048 61.839,51.048 58.912,53.975 39.765,53.975 38.886,53.096 R29.2
NetL1_1: L1.1 U2.8 U2.9 | length 0.9
  Top Layer w0.2: U2.9 U2.8
  Top Layer w0.254: L1.1@103.693,50.209 L1.1
NetL1_2: L1.2 U2.6 U2.7 | length 0.9
  Top Layer w0.2: U2.6 U2.7
  Top Layer w0.254: L1.2 L1.2@106.593,50.209
NetL2_2: L2.2 R10.1 U3.15 | length 26.8
  Top Layer w0.2: U3.15 25.665,16.245 30.504,11.406 L2.2
  Top Layer w0.25: L2.2@37.997,11.454 R10.1 R10.1@47.625,11.454
NetL3_2: L3.2 U4.2 | length 5.7
  Top Layer w0.4: 104.8,21.742 104.8,23.368 ; 104.8,23.407 105.787,23.407 105.844,23.464 106.03,23.464
  Top Layer w0.5: L3.2 105.664,24.954 106.03,24.588 106.03,23.464
NetLD1_1: LD1.1 R9.2 | length 2.8
  Top Layer w0.254: LD1.1 13.908,12.042 R9.2
NetLD1_2: LD1.2 U3.9 | length 17.9
  Top Layer w0.2: LD1.2 16.719,12.065 17.502,12.849 17.502,20.678 18.496,21.672 25.063,21.672 U3.9
NetLD2_1: LD2.1 R12.2 | length 5.3
  Top Layer w0.2: R12.2 13.208,16.168 13.886,15.49 LD2.1
NetLD2_2: LD2.2 U3.8 | length 18.7
  Top Layer w0.2: LD2.2 15.785,16.195 15.039,16.941 14.948,16.941 14.202,17.687 14.202,18.647 15.659,20.104 16.803,20.104 16.938,20.239 16.938,21.383 18.493,22.938 25.171,22.938 25.665,22.444 U3.8
NetQ1_1: Q1.1 Q2.1 | length 5.9
  Top Layer w0.2: Q2.1@51.449,50.47 52.605,50.47 53.266,51.131 Q1.1@54.479,51.131
  Top Layer w0.254: Q2.1@51.449,49.81 51.449,50.47 Q2.1@51.449,51.13 ; Q1.1@54.479,50.471 54.479,51.131 Q1.1@54.479,51.791
NetQ1_2: Q1.2 U5.1 | length 7.4
  Top Layer w0.2: U5.1 53.215,43.246 54.479,44.51 Q1.2
NetQ2_2: Q2.2 U5.3 | length 9.5
  Top Layer w0.2: Q2.2 51.449,52.211 51.816,52.578 v2(52.959,52.578) ; U5.3 52.935,45.166 52.935,46.482 v2(52.932,46.485)
  Bottom Layer w0.2: v2(52.932,46.485) 52.946,46.499 52.946,52.565 v2(52.959,52.578)
NetQ3_3: Q3.3 R28.2 | length 18.7
  Top Layer w0.2: Q3.3@77.101,49.243 77.14,49.205 Q3.3@77.425,49.205 ; Q3.3@77.425,47.225 Q3.3@77.425,47.885 ; Q3.3@77.425,48.477 77.47,48.523 77.47,49.205 77.09,49.205 76.327,48.442 76.327,48.214 76.656,47.885 Q3.3@77.425,47.885 ; Q3.3@77.425,48.545 Q3.3@77.425,47.885 ; Q3.3@77.47,49.258 77.47,50.673
  Top Layer w2: R28.2 77.47,50.673
NetR1_1: R1.1 R2.2 | length 2.7
  Top Layer w0.254: R1.1 R2.2
NetR1_2: R1.2 R26.2 U1.5 | length 12.9
  Top Layer w0.2: R26.2 65.97,29.083 66.929,29.083 68.499,27.513 R1.2 72.71,28.534 73.706,29.53 U1.5
NetR2_1: R2.1 R3.2 U1.3 | length 22.4
  Top Layer w0.2: v2(71.308,26.665) v2@71.43,26.543 ; v2(71.308,29.418) 73.406,31.516 77.592,31.516 78.278,30.83 U1.3 ; R3.2 72.705,25.268 v2@71.43,26.543 ; R2.1 79.182,26.568 v2@71.43,26.543
  Bottom Layer w0.2: v2(71.308,29.418) v2(71.308,26.665) 71.308,26.543 v2@71.43,26.543
NetR3_1: R3.1 R4.2 | length 2.7
  Top Layer w0.254: R3.1 R4.2
NetR4_1: R4.1 R5.2 U1.1 | length 14.6
  Top Layer w0.2: 78.198,23.703 R4.1@79.243,24.748 ; U1.1 79.451,29.53 80.38,28.601 80.38,26.335 79.243,25.198 R4.1
  Top Layer w0.254: R5.2 72.644,23.388 72.959,23.703 78.198,23.703 ; R4.1@79.243,24.748 R4.1
NetR5_1: R5.1 R6.2 | length 2.8
  Top Layer w0.254: R5.1 R6.2
NetR8_1: R7.1 U2.14 | length 19
  Top Layer w0.254: U2.14 103.706,43.868 106.426,41.148 106.426,36.322 108.204,34.544 113.516,34.544 113.665,34.693 113.665,36.258 R7.1
NetR9_1: R8.1 R25.2 | length 16.8
  Top Layer w0.2: R25.2 91.265,51.006 90.63,51.006 90.297,50.673 90.297,43.561 93.091,40.767 R8.1
NetR9_2: R8.2 U2.12 | length 7.8
  Top Layer w0.2: R8.2 100.203,40.767 101.854,42.418 101.854,44.831 102.497,45.474 U2.12
NetR13_2: R11.2 U3.13 | length 15.3
  Top Layer w0.2: R11.2 19.812,13.36 21.667,15.215 23.47,15.215 23.876,15.621 23.876,16.651 23.427,17.1 22.905,17.1 22.733,17.272 22.733,18.415 24.292,19.974 U3.13
NetR14_1: R14.1 U3.11 | length 5.3
  Top Layer w0.2: R14.1 20.014,19.85 20.938,20.774 U3.11
NetR15_2: R13.2 U3.18 | length 24.1
  Top Layer w0.2: v2(19.077,3.685) 21.301,1.461 R13.2 ; U3.18 26.966,16.875 v2(28.854,14.986)
  Bottom Layer w0.2: v2(19.077,3.685) 19.085,3.685 24.033,8.633 24.033,8.674 28.854,13.495 v2(28.854,14.986)
NetR16_1: R16.1 R18.2 U3.19 | length 12.2
  Top Layer w0.2: U3.19 27.364,19.373 27.364,17.848 30.099,15.113 v2(30.099,13.716) ; R16.1 R18.2 v2(28.575,12.192)
  Bottom Layer w0.2: v2(28.575,12.192) v2(30.099,13.716)
NetR17_2: R15.2 U3.10 | length 14.7
  Top Layer w0.2: R15.2 19.474,16.19 18.391,17.272 18.391,20.193 19.372,21.174 U3.10
NetR19_1: R17.1 RT1.2 U3.12 | length 16.7
  Top Layer w0.2: RT1.2 21.058,7.911 R17.1@22.634,9.487 ; v2(21.439,13.708) 21.439,10.757 22.334,9.862 22.334,9.787 R17.1@22.634,9.487 ; v2(21.463,17.018) 21.439,17.042 21.439,17.907 23.906,20.374 U3.12 ; R17.1@22.634,9.487 R17.1 R17.1@22.634,9.487
  Bottom Layer w0.2: v2(21.439,13.708) 21.451,13.719 21.451,17.006 v2(21.463,17.018)
NetR21_1: R19.1 R20.2 U4.4 | length 12.9
  Top Layer w0.2: U4.4 105.525,24.396 104.394,25.527 104.394,27.061 104.511,27.178 106.807,27.178 107.95,26.035 R19.1@107.95,23.406
  Top Layer w0.25: R19.1@107.95,23.406 108.1,23.256 108.393,23.256 109.843,21.806 R20.2
NetR23_1: R21.1 R29.1 | length 11.7
  Top Layer w0.2: R29.1 41.886,46.163 42.291,45.758 R21.1
NetR24_1: R22.1 U5.2 | length 6.9
  Top Layer w0.2: U5.2 52.615,44.196 52.416,43.996 52.086,43.666 52.086,42.586 52.315,42.356 55.377,42.356 56.289,43.269 R22.1
NetR33_2: R31.2 U4.5 U4.6 | length 15.5
  Top Layer w0.2: 101.092,23.495 104.255,23.495 U4.6@104.518,23.758
  Top Layer w0.25: R31.2 92.663,25.955 96.012,22.606 100.203,22.606 101.092,23.495 ; U4.6 U4.5
pads on no net: P1. P2. P3. P4. U5.4

## Polygon pours and split planes (outlines as drawn)
GND on Top Layer "NONET_L-01_P-001" (solid, pour order 50): 0.006,3.001 0,53.007 0.001,53.007 cw(c3.001,53.007) 3.001,56.007 124,56.007 124,56.008 cw(c124,53.008) 127,53.008 127,3.902 cw(c123.098,3.902) 123.098,0 3.006,0 3.006,0.001 cw(c3.006,3.001)
NetC3_1 on Top Layer "NONET_L-01_P-001" (solid, pour order 44): 124.46,52.959 124.46,50.8 120.142,50.8 116.332,46.99 116.332,41.783 114.427,41.783 114.173,42.037 114.173,52.959